# Altium PCB DataSampleHub.PcbDoc (part 3 of 3)
Units mil, origin at the board's own origin, x right, y up, seen from the top; angles counter-clockwise.
Board outline 7885.07 x 6309.28 mil, 2 copper layers (Top Layer, Bottom Layer), stack 65.792 mil thick; 360 components, 225 nets, 1247 pads, 854 vias.
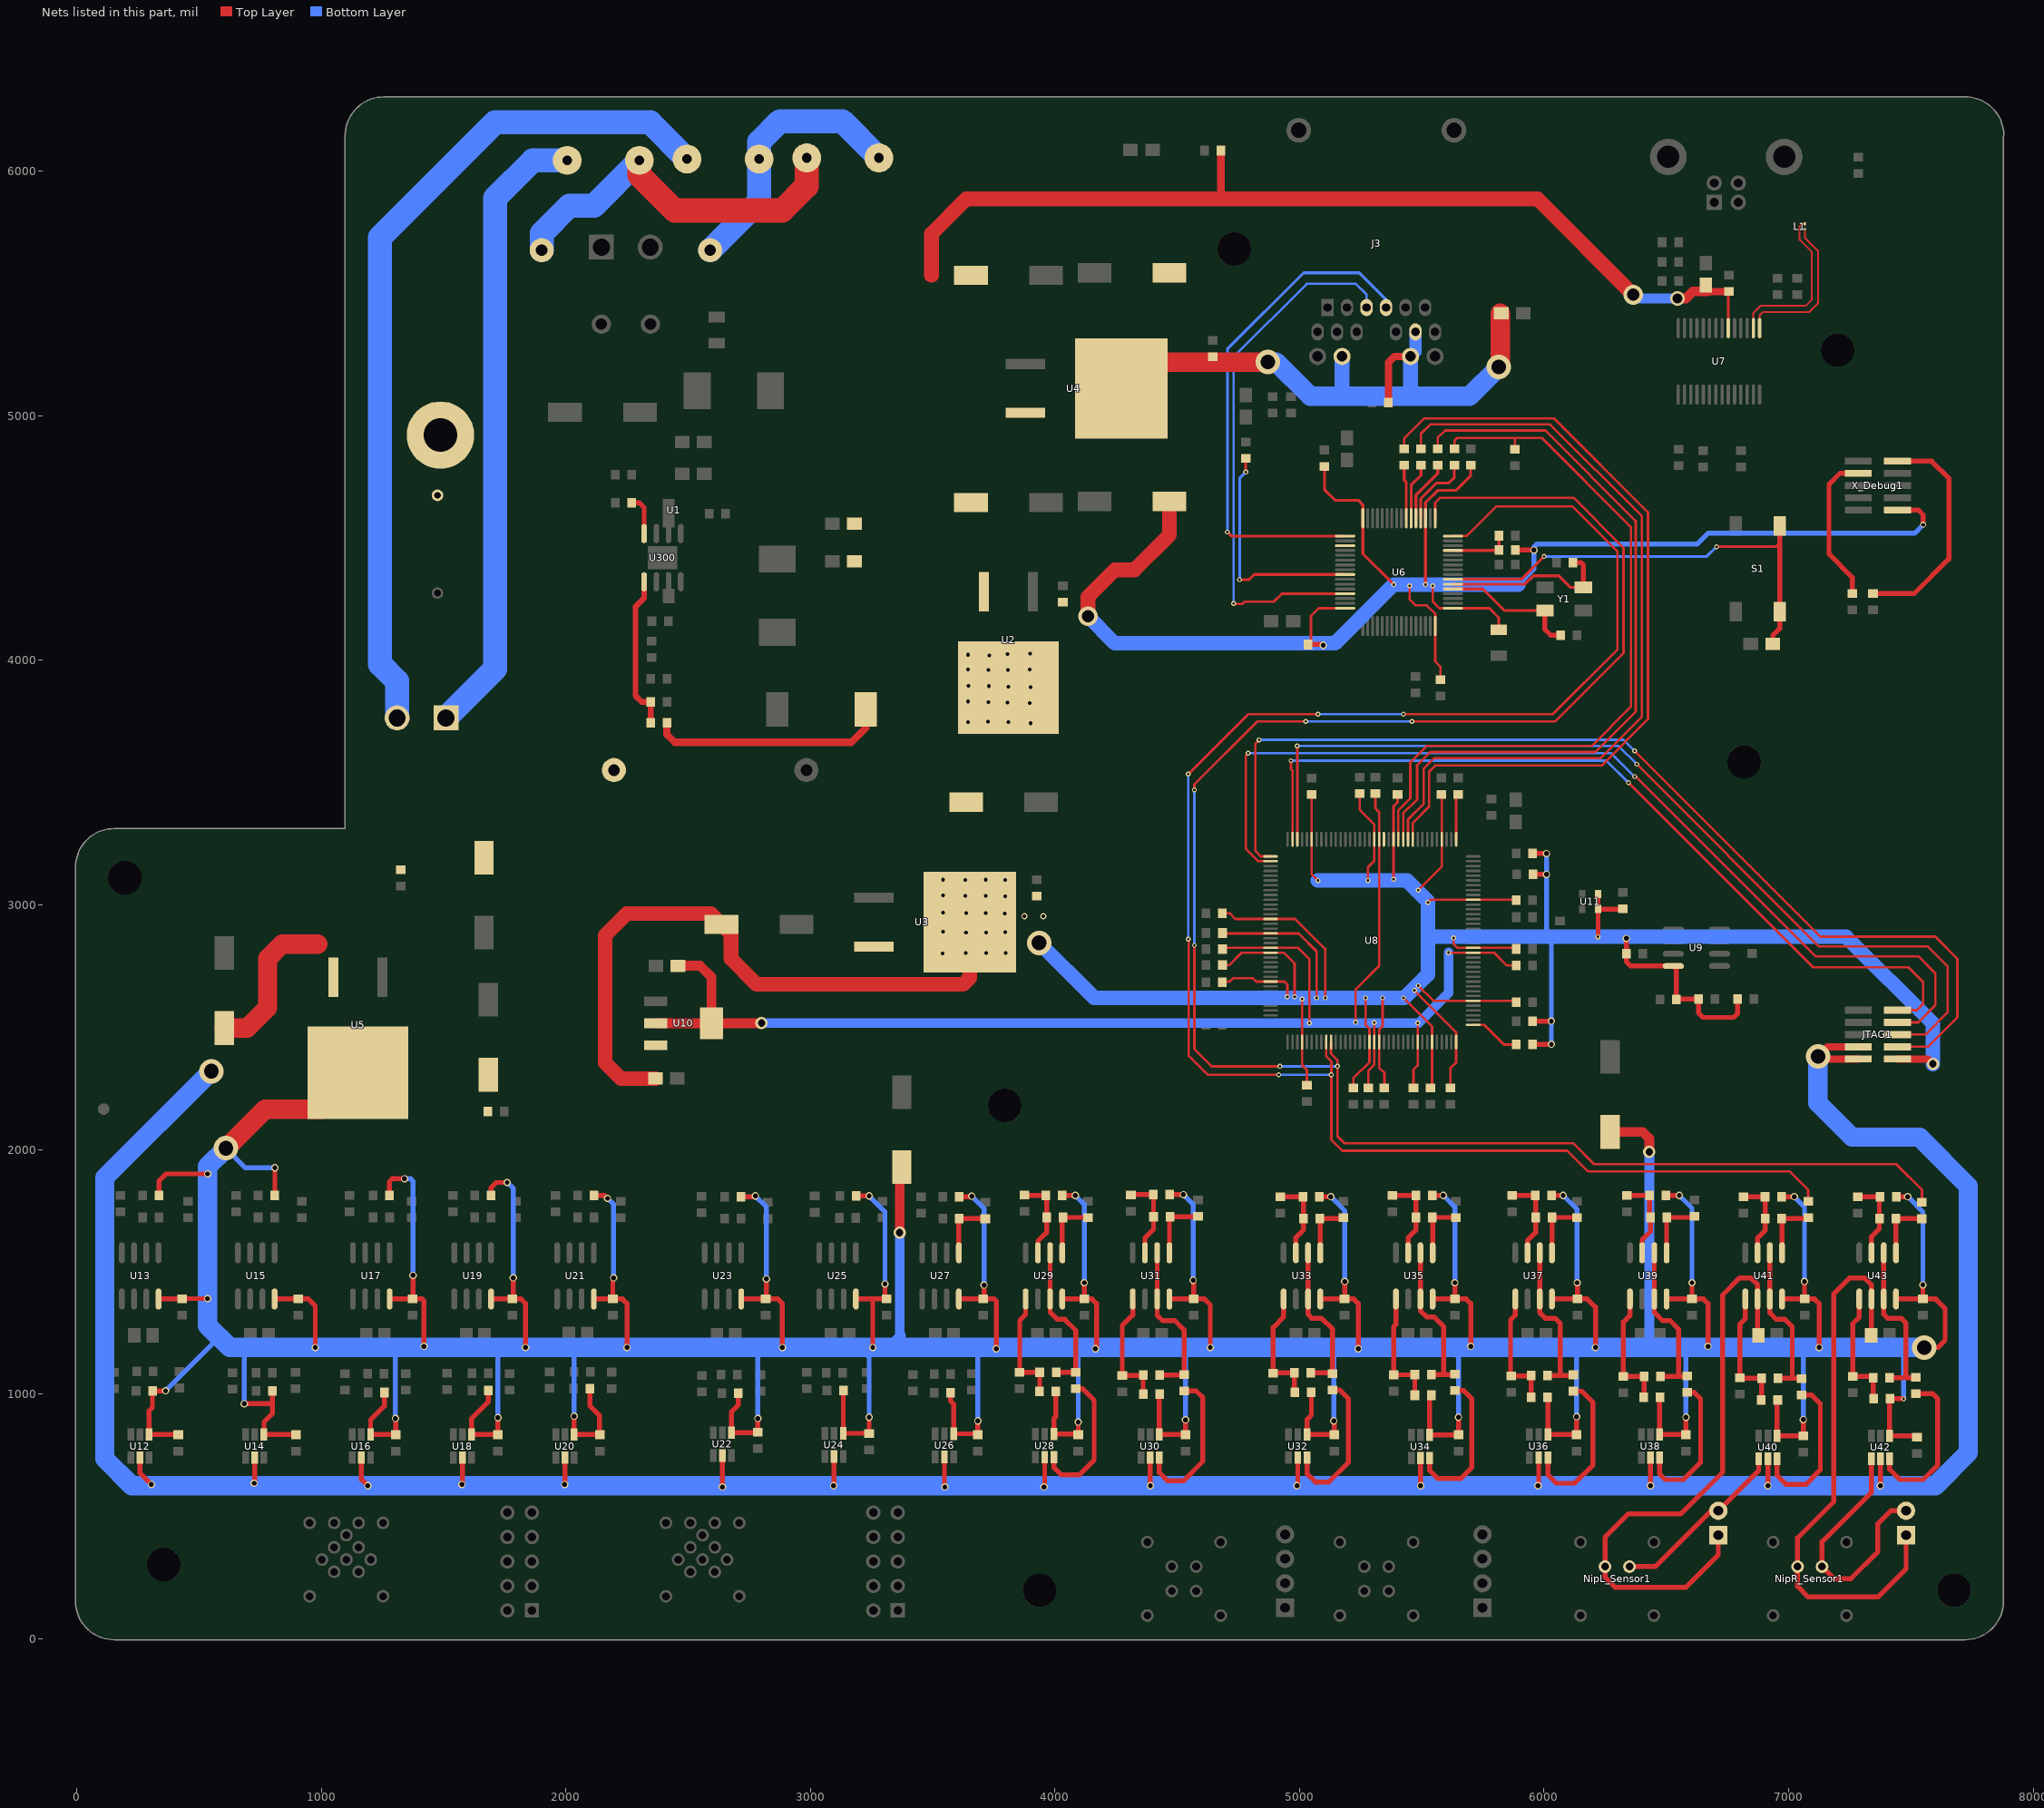
[diagram p3: the nets of this part, all layers, seen from the top]

## Via types
v1: diameter 25, hole 15, Top Layer to Bottom Layer, 584 vias
v2: diameter 20, hole 10, Top Layer to Bottom Layer, 130 vias
v3: diameter 30, hole 20, Top Layer to Bottom Layer, 103 vias
v4: diameter 50, hole 35, Top Layer to Bottom Layer, 11 vias
v5: diameter 100, hole 60, Top Layer to Bottom Layer, 7 vias
v6: diameter 50, hole 30, Top Layer to Bottom Layer, 4 vias
v7: diameter 40, hole 30, Top Layer to Bottom Layer, 4 vias
v8: diameter 19.68, hole 7.87, Top Layer to Bottom Layer, 4 vias
v9: diameter 80, hole 50, Top Layer to Bottom Layer, 2 vias
v10: diameter 133.86, hole 133.86, Top Layer to Bottom Layer, 2 vias
v11: diameter 35, hole 15, Top Layer to Bottom Layer, 1 vias
v12: diameter 60, hole 40, Top Layer to Bottom Layer, 1 vias
v13: diameter 20, hole 15, Top Layer to Bottom Layer, 1 vias

## Nets (pads, with @x,y where several pads share a name; then routed paths per layer and width w, separated by ;. In a path a pad name is that pad's centre, name@x,y a point inside that pad or via, vN(x,y) a via of type N, cw(c..) or ccw(c..) an arc to the next point about the centre after c; other vN are vias at no path point) (continued)
NetR89_2: R89.2 R152.1 U27.1 | length 236.8
  Top Layer w20: U27.1@3607,1577.49 3607,1715.54 R89.2@3608.46,1717 3704.53,1717 R152.1@3705,1716.54
NetR93_1: R93.1 U28.6 | length 583.1
  Top Layer w20: U28.6@3995.4,741.76 3995.4,699.6 4025,670 4100,670 4160,730 4160,975 4113.46,1021.54 R93.1@4085,1021.54
NetR93_2: R93.2 R97.2 U29.2 U29.7 | length 630.8
  Top Layer w20: U29.2@3980,1577.49 U29.7@3980,1388.51 3980,1335 4010,1305 4040,1305 4085,1260 R93.2@4085,1088.46 4084.47,1089 R97.2@4004.46,1089
NetR94_1: R94.1 R96.1 R98.2 U29.3 | length 338
  Top Layer w20: R98.2@3875,1811.46 3875.54,1812 R94.1@3962.54,1812 ; U29.3@3930,1577.49 3930,1625 3965.54,1660.54 R96.1@3965.54,1722 3965.54,1809 3963.07,1811.46 R94.1@3962.54,1811.46
NetR95_1: R95.1 R97.1 R99.2 U29.5 | length 472.2
  Top Layer w20: R99.2@3855,1088.46 R99.2@3856,1088.46 ; U29.5@3880,1388.51 3880,1325 3856,1301 R99.2@3856,1088.46 ; R95.1@3936.53,1010 3937.54,1011 R97.1@3937.54,1089 3937,1088.46 R99.2@3856,1088.46
NetR96_2: R96.2 R153.1 U29.1 | length 248.3
  Top Layer w20: U29.1@4030,1577.49 4030,1719.54 R96.2@4032.46,1722 4134.53,1722 R153.1@4135,1721.54
NetR100_1: R100.1 U30.6 | length 635.2
  Top Layer w20: U30.6@4426.4,739.76 4426.4,678.6 4460,645 4525,645 4605,725 4605,985 4577.47,1012.53 R100.1@4528,1012.53
NetR100_2: R100.2 R104.2 U31.2 U31.7 | length 674
  Top Layer w20: U31.2@4418,1577.49 U31.7@4418,1388.51 4418,1322 4440,1300 4490,1300 4528,1262 R100.2@4528,1079.46 4526.54,1078 R104.2@4427.46,1078
NetR101_1: R101.1 R103.1 R105.2 U31.3 | length 348.8
  Top Layer w20: R105.2@4314,1811 R105.2@4310.54,1814.46 4311.07,1815 R101.1@4401.54,1815 4403.07,1813.46 R103.1@4403.07,1725 4403.07,1673.07 4368,1638 U31.3@4368,1577.49
NetR102_1: R102.1 R104.1 R106.2 U31.5 | length 495.4
  Top Layer w20: U31.5@4318,1388.51 4318,1323 4275,1280 R106.2@4275,1075.46 4358,1075.46 R104.1@4360.54,1078 R102.1@4360.54,1000
NetR103_2: R103.2 R154.1 U31.1 | length 264
  Top Layer w20: U31.1@4468,1577.49 4468,1723 R103.2@4470,1725 4583.46,1725 R154.1@4585,1726.54
NetR107_1: R107.1 U32.6 | length 622.4
  Top Layer w20: U32.6@5030.4,739.76 5030.4,674.6 5065,640 5120,640 5200,720 5200,980 5163.47,1016.53 R107.1@5135,1016.53
NetR107_2: R107.2 R111.2 U33.2 U33.7 | length 648.9
  Top Layer w20: U33.2@5035,1577.49 U33.7@5035,1388.51 5035,1325 5050,1310 5090,1310 5135,1265 R107.2@5135,1083.46 5131.46,1087 R111.2@5046.46,1087
NetR108_1: R108.1 R110.1 R112.2 U33.3 | length 401.1
  Top Layer w20: R112.2@4921,1806.46 R112.2@4921.07,1806.54 ; U33.3@4985,1577.49 4985,1640 5016.54,1671.54 R110.1@5016.54,1717 5016.54,1805 R108.1@5014.54,1807 4921.54,1807 R112.2@4921.07,1806.54 ; 4985,1806.54 R112.2@4921.07,1806.54
NetR109_1: R109.1 R111.1 R113.2 U33.5 | length 491.3
  Top Layer w20: U33.5@4935,1388.51 4935,1315 4892,1272 R113.2@4892,1084.46 4894.54,1087 R111.1@4979.54,1087 4979.54,1009 R109.1@4981.54,1007
NetR110_2: R110.2 R159.1 U33.1 | length 238.6
  Top Layer w20: U33.1@5085,1577.49 5085,1715.46 R110.2@5083.46,1717 5175.47,1717 R159.1@5180,1721.54
NetR114_1: R114.1 U34.6 | length 618.2
  Top Layer w20: U34.6@5532.4,737.76 5532.4,687.6 5565,655 5660,655 5705,700 5705,980 5670.47,1014.53 R114.1@5636,1014.53
NetR114_2: R114.2 R118.2 U35.2 U35.7 | length 652.9
  Top Layer w20: U35.2@5494.27,1577.49 U35.7@5494.27,1388.51 5494.27,1340.73 5520,1315 5550,1315 5590,1275 5590,1080 ; R118.2@5538.46,1080 5590,1080 ; R114.2@5636,1081.46 5634.54,1080 5590,1080
NetR115_1: R115.1 R117.1 R119.2 U35.3 | length 344
  Top Layer w20: R119.2@5379,1811.46 R115.1@5475.54,1811.46 ; U35.3@5444.27,1577.49 5444.27,1639.27 5475.54,1670.54 R117.1@5475.54,1722 R115.1@5475.54,1811.46 ; R115.1@5475.54,1812 R115.1@5475.54,1811.46
NetR116_1: R116.1 R118.1 R120.2 U35.5 | length 486.1
  Top Layer w20: U35.5@5394.27,1388.51 5394.27,1284.27 5385,1275 R120.2@5385,1078.46 5470,1078.46 R118.1@5471.54,1080 R116.1@5471.54,995
NetR117_2: R117.2 R160.1 U35.1 | length 243
  Top Layer w20: U35.1@5544.27,1577.49 5544.27,1720.19 R117.2@5542.46,1722 5639.53,1722 R160.1@5640,1721.54
NetR121_1: R121.1 U36.6 | length 654.4
  Top Layer w20: U36.6@6015.4,739.76 6015.4,669.6 6050,635 6125,635 6200,710 6200,965 6153.47,1011.53 R121.1@6120,1011.53
NetR121_2: R121.2 R125.2 U37.2 U37.7 | length 667.4
  Top Layer w20: U37.2@5982.27,1577.49 U37.7@5982.27,1388.51 5982.27,1332.73 6005,1310 6045,1310 6065.5,1289.5 6065.5,1075 ; R125.2@6014.46,1075 6065.5,1075 ; R121.2@6120,1078.46 6116.54,1075 6065.5,1075
NetR122_1: R122.1 R124.1 R126.2 U37.3 | length 342.9
  Top Layer w20: R126.2@5870,1811.46 5870.54,1812 R122.1@5963.54,1812 5965.54,1810 R124.1@5965.54,1722 5965.54,1660.54 5932.27,1627.27 U37.3@5932.27,1577.49
NetR123_1: R123.1 R125.1 R127.2 U37.5 | length 496.4
  Top Layer w20: U37.5@5882.27,1388.51 5882.27,1322.27 5863,1303 5863,1075.46 R127.2@5865,1073.46 5946,1073.46 R125.1@5947.54,1075 5947.54,987 R123.1@5946.54,986
NetR124_2: R124.2 R157.1 U37.1 | length 242.3
  Top Layer w20: U37.1@6032.27,1577.49 6032.27,1721.81 R124.2@6032.46,1722 6129.53,1722 R157.1@6130,1721.54
NetR128_1: R128.1 U38.6 | length 599.1
  Top Layer w20: U38.6@6472.4,739.76 6472.4,672.6 6495,650 6570,650 6640,720 6640,980 6613.47,1006.53 R128.1@6585,1006.53
NetR128_2: R128.2 R132.2 U39.2 U39.7 | length 673.2
  Top Layer w20: U39.2@6451,1577.49 U39.7@6451,1388.51 6451,1334 6485,1300 6515,1300 6550,1265 6550,1072 ; R132.2@6476.46,1072 6550,1072 ; R128.2@6585,1073.46 6583.54,1072 6550,1072
NetR129_1: R129.1 R131.1 R133.2 U39.3 | length 342.8
  Top Layer w20: R133.2@6339,1811.46 6432.07,1811.46 6432.07,1725.46 R131.1@6435.54,1722 6435.54,1665.54 6401,1631 U39.3@6401,1577.49
NetR130_1: R130.1 R132.1 R134.2 U39.5 | length 499.8
  Top Layer w20: U39.5@6351,1388.51 6351,1321 6324,1294 R134.2@6324,1072.46 6409.07,1072.46 R132.1@6409.54,1072 6409.54,988 R130.1@6407.54,986
NetR131_2: R131.2 R158.1 U39.1 | length 259.5
  Top Layer w20: U39.1@6501,1577.49 6501,1720.54 R131.2@6502.46,1722 6610.47,1722 R158.1@6615,1726.54
NetR135_1: R135.1 U40.6 | length 646.9
  Top Layer w20: U40.6@6952.4,734.76 6952.4,667.6 6990,630 7070,630 7130,690 7130,960 7094.47,995.53 R135.1@7053,995.53
NetR135_2: R135.2 R139.2 U41.2 U41.7 | length 669.3
  Top Layer w20: U41.2@6923,1577.49 U41.7@6923,1388.51 6923,1332 6950,1305 6985,1305 7015,1275 7015,1064 ; R139.2@6956.46,1064 7015,1064 ; R135.2@7053,1062.46 7051.46,1064 7015,1064
NetR136_1: R136.1 R138.1 R140.2 U41.3 | length 330.7
  Top Layer w20: R140.2@6816,1806.46 6816.54,1807 R136.1@6903.54,1807 6904.54,1806 R138.1@6904.54,1717 6904.54,1669.54 6873,1638 U41.3@6873,1577.49
NetR137_1: R137.1 R139.1 R141.2 U41.5 | length 509.1
  Top Layer w20: U41.5@6823,1388.51 6823,1308 6801,1286 R141.2@6801,1066.46 6803.46,1064 R139.1@6889.54,1064 6889.54,977 R137.1@6888.54,976
NetR138_2: R138.2 R155.1 U41.1 | length 250.6
  Top Layer w20: U41.1@6973,1577.49 6973,1715.46 R138.2@6971.46,1717 7075.47,1717 R155.1@7080,1721.54
NetR142_1: R142.1 U42.6 | length 650.8
  Top Layer w20: U42.6@7413.4,734.76 7413.4,691.6 7455,650 7550,650 7610,710 7610,980 7588.47,1001.53 R142.1@7520,1001.53
NetR142_2: R142.2 R146.2 U43.2 U43.7 | length 688.5
  Top Layer w20: U43.2@7389,1577.49 U43.7@7389,1388.51 7389,1326 7405,1310 7460,1310 7480,1290 7480,1067 ; R146.2@7412.46,1067 7480,1067 ; R142.2@7520,1068.46 7518.54,1067 7480,1067
NetR143_1: R143.1 R145.1 R147.2 U43.3 | length 337.6
  Top Layer w20: R147.2@7287.07,1802.93 R147.2@7283.54,1806.46 7284.07,1807 R143.1@7373.07,1807 ; U43.3@7339,1577.49 7339,1644 7371.07,1676.07 R145.1@7371.07,1717 7371.07,1805 R143.1@7372.53,1806.46
NetR144_1: R144.1 R146.1 R148.2 U43.5 | length 499.9
  Top Layer w20: U43.5@7289,1388.51 7289,1314 7262,1287 R148.2@7262,1072.46 7340.07,1072.46 R146.1@7345.54,1067 7345.54,983 R144.1@7347.54,981
NetR145_2: R145.2 R156.1 U43.1 | length 247.1
  Top Layer w20: U43.1@7439,1577.49 7439,1716 R145.2@7438,1717 7544.53,1717 R156.1@7545,1716.54
NetR300_1: R300.1 R302.2 U300.5 | length 638
  Top Layer w23.62: U300.5@2320,4321.57 2320,4255 2285,4220 2285,3855 2310,3830 R302.2@2346.54,3830 R300.1@2346.54,3745
NetR303_2: R303.2 U300.4 | length 166.4
  Top Layer w19.68: R303.2@2268.46,4645 2300,4645 2320,4625 U300.4@2320,4518.43
NIPL_CON0: C92.2 NipL_Sensor1.1 NipL_Sensor.1 U41.6 | length 2494.3
  Top Layer w20: NipL_Sensor1.1@6249.21,286.22 NipL_Sensor1.1@6249.21,294.09 ; NipL_Sensor.1@6712.6,422.44 6712.6,342.6 6580,210 6290,210 6249.21,250.79 NipL_Sensor1.1@6249.21,294.09 ; C92.2@6876.6,1240 6873,1243.6 U41.6@6873,1388.51 6873,1447 6845,1475 6800,1475 6730,1405 6730,680 6560,510 6345,510 6249.21,414.21 NipL_Sensor1.1@6249.21,294.09
NIPL_CON1: NipL_Sensor1.2 NipL_Sensor.2 U40.4 | length 738.6
  Top Layer w20: NipL_Sensor1.2@6349.21,294.09 6454.09,294.09 6682.44,522.44 NipL_Sensor.2@6712.6,522.44 6877.6,687.44 U40.4@6877.6,734.76
NIPL_SENSOR: R155.2 U6.16 U8.9 | length 7423.6
  Top Layer w10: v2(4545,2860) 4547,2858 4547,2383 4625,2305 v2(4915,2305) ; v2(4545,3535) 4790,3780 v2(5075,3780) ; U8.9@5108.99,2439.63 5108.99,2381.01 5130,2360 v2(5130,2305) 5130,2040 5175,1995 6095,1995 6180,1910 7005,1910 7080,1835 R155.2@7080,1788.46 ; v2(5425,3780) 6035,3780 6300,4045 6300,4445 6115,4630 5805,4630 5683.64,4508.64 U6.16@5627.47,4508.64
  Bottom Layer w10: v2(4545,2860) v2(4545,3535) ; v2(4915,2305) v2(5130,2305) ; v2(5075,3780) v2(5425,3780)
NIPR_CON0: C93.2 NipR_Sensor1.1 NipR_Sensor.1 U43.6 | length 2312
  Top Layer w20: NipR_Sensor1.1@7036.61,286.22 NipR_Sensor1.1@7036.61,294.09 ; C93.2@7337.6,1240 7339,1241.4 U43.6@7339,1388.51 7339,1446 7310,1475 7250,1475 7185,1410 7185,560 7036.61,411.61 NipR_Sensor1.1@7036.61,294.09 ; NipR_Sensor.1@7480.31,422.44 7480.31,285.32 7365,170 7080,170 7036.61,213.39 NipR_Sensor1.1@7036.61,294.09
NIPR_CON1: NipR_Sensor1.2 NipR_Sensor.2 U42.4 | length 1078.5
  Top Layer w20: NipR_Sensor1.2@7136.61,286.22 NipR_Sensor1.2@7136.61,294.09 ; U42.4@7338.6,734.76 7338.6,598.6 7136.61,396.61 NipR_Sensor1.2@7136.61,294.09 ; NipR_Sensor.2@7480.31,522.44 7417.44,522.44 7365,470 7365,355 7255,245 7185.71,245 NipR_Sensor1.2@7136.61,294.09
NIPR_SENSOR: R156.2 U6.17 U8.10 | length 7959.5
  Top Layer w10: v2(4570,2835) 4570,2410 4640,2340 v2(4920,2340) ; v2(4570,3470) 4570,3493 4827,3750 v2(5025,3750) ; U8.10@5128.68,2439.63 5128.68,2391.32 5155,2365 v2(5155,2340) 5155,2055 5185,2025 6120,2025 6205,1940 7440,1940 7545,1835 R156.2@7545,1783.46 ; v2(5460,3750) 6045,3750 6325,4030 6325,4460 6120,4665 5575,4665 5554.64,4644.64 U6.17@5554.64,4581.47
  Bottom Layer w10: v2(4570,2835) v2(4570,3470) ; v2(4920,2340) v2(5155,2340) ; v2(5025,3750) v2(5460,3750)
PE: PAD.1 R3.1
POWER_L: F1.2 R1.2 U1.2 | length 1553
  Top Layer w98.43: F1.2@2300.28,6045 2300.28,5984.72 2445,5840 2885,5840 2984.72,5939.72 R1.2@2984.72,6055
  Bottom Layer w98.43: U1.2@1901.02,5677.36 1901.02,5746.02 2015,5860 2115.28,5860 F1.2@2300.28,6045
POWER_N: F2.2 R1.1 U1.1 | length 1112.8
  Bottom Layer w98.43: U1.1@2590,5677.36 2790.28,5877.64 F2.2@2790.28,6050 2790.28,6120.28 2875,6205 3130,6205 R1.1@3280,6055
POWERIN_L: F1.1 J1.1 | length 2567
  Bottom Layer w98.43: J1.1@1510,3765 1710,3965 1710,5890 1865,6045 F1.1@2005,6045
POWERIN_N: F2.1 J1.2 | length 3505.8
  Bottom Layer w98.43: J1.2@1310,3765 1310,3915 1240,3985 1240,5730 1710,6200 2345,6200 F2.1@2495,6050
PROM_B: R29.1 U8.37 | length 208.5
  Top Layer w10: U8.37@5710.37,2509.51 5755.49,2509.51 5836,2429 R29.1@5885.54,2429
PWR5V: C1.1 C2.2 C5.1 C8.1 C11.1 C14.1 C15.2 C16.1 C302.2 C303.2 JTAG1.2 JTAG1.4 L300.2 R2.2 R300.2 U1.4 U2.3 U3.3 U4.3 U5.3 U7.20 U12.5 U14.5 U16.5 U18.5 U20.5 U22.5 U24.5 U26.5 U28.5 U30.5 U32.5 U34.5 U36.5 U38.5 U40.5 U42.5 | length 19388.7
  Top Layer w10: U7.20@6753.39,5358.83 6753.39,5505.92 C16.1@6756,5508.53
  Top Layer w20: U12.5@258,739.76 258,677 v3(305,630) ; v3(725,635) 728,638 U14.5@728,739.76 ; U16.5@1164,739.76 1164,651 v3(1190,625) ; v3(1575,630) 1576.73,631.73 U18.5@1576.73,739.76 ; v3(1995,630) 1996.54,631.54 U20.5@1996.54,739.76 ; v3(2640,620) U22.5@2640,747.76 ; v3(3095,625) 3097,627 U24.5@3097,744.76 ; U26.5@3548,742.76 3548,622 v3(3550,620) ; v3(3955,620) 3958,623 U28.5@3958,741.76 ; U30.5@4389,739.76 4389,626 v3(4390,625) ; v3(4990,625) 4993,628 U32.5@4993,739.76 ; v3(5495,625) U34.5@5495,737.76 ; v3(5975,625) 5978,628 U36.5@5978,739.76 ; v3(6435,625) U38.5@6435,739.76 ; v3(6915,625) U40.5@6915,734.76 ; v3@7376,626 U42.5@7376,734.76
  Top Layer w30: R300.2@2413.46,3745 2413.46,3696.54 2445,3665 3168,3665 3226.1,3723.1 L300.2@3226.1,3800 ; 4672,5887 4678.46,5893.46 R2.2@4678.46,6085 ; C15.2@6671,5508.85 6671.32,5508.53 C16.1@6756,5508.53 ; JTAG1.2@7285,2370 7130,2370 v5(7120,2380) 7160,2420 JTAG1.4@7285,2420
  Top Layer w31.5: C1.1@1665,3193.54 C1.1@1665.08,3193.46
  Top Layer w40: v12(6545,5480) 6580,5480 6608.85,5508.85 C15.2@6671,5508.85
  Top Layer w60: 3495,5575 3495,5745 3637,5887 4672,5887 5973,5887 v9(6365,5495) v9@6370,5490
  Top Layer w78.74: C14.1@603,2496.46 696.46,2496.46 780,2580 780,2780 840,2840 985,2840
  Bottom Layer w40: v9(6365,5495) 6380,5480 v12(6545,5480)
  Bottom Layer w78.74: v5(550,2320) 115,1885 115,735 225,625 v3(1190,625) v3(3095,625) v3(4390,625) v3(4990,625) v3(5495,625) v3(5975,625) v3(6435,625) v3(6915,625) v3(7375,625) 7600,625 7735,760 7735,1850 7535,2050 7260,2050 7120,2190 v5(7120,2380)
R\E\S\E\T\: C20.1 S1.3 S1.4 U6.7 | length 1892.1
  Top Layer w11.81: U6.7@5627.47,4331.47 5906.47,4331.47 v2(6000,4425) ; v2(6705,4465) 6949,4465 6964,4480
  Top Layer w20: C20.1@6935,4068 6935,4102 6964,4131 S1.4@6964,4200 6964,4480 S1.3@6964,4550
  Bottom Layer w11.81: v2(6000,4425) 6665,4425 v2(6705,4465)
RJ45_RST: J3.4 U6.33 | length 2092.7
  Top Layer w11.81: v2(4705,4525) 4721.36,4508.64 U6.33@5186.53,4508.64
  Bottom Layer w11.81: v2(4705,4525) 4705,5273 5017,5585 5245,5585 5354,5476 J3.4@5354,5443
RTS: U8.88
RTS1: J3.3 U6.45 | length 2221
  Top Layer w10: v2(4730,4233) 4732,4231 4767,4231 4776,4240 4895,4240 4927.42,4272.42 U6.45@5186.53,4272.42
  Bottom Layer w10: v2(4730,4233) 4730,5240 5030,5540 5230,5540 5274,5496 J3.3@5274,5443
RTS3: U6.35
SPI1_MISO: R11.2 U8.83 | length 3251.9
  Top Layer w10: U8.83@5443.64,3268.37 5443.64,3349.64 5508,3414 5508,3558 5550,3600 6230,3600 6400,3770 6400,4020 6400,4590 6025,4965 5535,4965 5496.58,4926.58 R11.2@5496.58,4865.46
SPI1_MISO1: R11.1 U6.22 | length 240.3
  Top Layer w11.81: U6.22@5456.21,4581.47 5456.21,4716.21 5496.58,4756.58 R11.1@5496.58,4798.54 R11.1@5501.21,4793.91
SPI1_MOSI: R12.2 U8.82 | length 3366.2
  Top Layer w10: R12.2@5428.23,4865.46 5428.23,4908.23 5510,4990 6040,4990 6425,4605 6425,3760 6235,3570 5555,3570 5530,3545 5530,3402 5463.32,3335.32 U8.82@5463.32,3268.37
SPI1_MOSI1: R12.1 U6.23 | length 220.5
  Top Layer w11.81: R12.1@5428.23,4798.54 5428.23,4736.77 5436.53,4728.47 U6.23@5436.53,4581.47
SPI1_NSS: C107.2 R9.2 U8.85 | length 3023
  Top Layer w10: U8.85@5404.27,3268.37 5404.27,3387.27 5453,3436 5453,3583 5520,3650 6195,3650 6355,3810 6355,4545 5990,4910 5645,4910 5633.29,4898.29 R9.2@5633.29,4865.46 ; C107.2@5880,4863.46 5880,4910
SPI1_NSS1: R9.1 U6.20 | length 303.4
  Top Layer w11.81: U6.20@5495.58,4581.47 5495.58,4660.58 5560,4725 5610,4725 5633.29,4748.29 R9.1@5633.29,4798.54
SPI1_SCK: R10.2 U8.84 | length 3111.2
  Top Layer w10: U8.84@5423.95,3268.37 5423.95,3373.95 5481,3431 5481,3571 5535,3625 6210,3625 6375,3790 6375,4145 6375,4570 6005,4940 5595,4940 5564.94,4909.94 R10.2@5564.94,4865.46
SPI1_SCK1: R10.1 U6.21 | length 253.9
  Top Layer w11.81: U6.21@5475.9,4581.47 5475.9,4675.9 5564.94,4764.94 R10.1@5564.94,4798.54
STATUS: R21.2 U6.41 | length 947.2
  Top Layer w11.81: v2(4755,4330) 4793.84,4330 4815,4351.16 U6.41@5186.53,4351.16 ; v2(4780,4770) R21.2@4780,4826.54
  Bottom Layer w11.81: v2(4755,4330) 4755,4745 v2(4780,4770)
SUSPEND: R30.2 U8.73 | length 187.7
  Top Layer w10: U8.73@5640.49,3268.37 5640.49,3444.02 R30.2@5649,3452.53
SWCLK: R18.2 X_Debug1.8 | length 624.5
  Top Layer w20: R18.2@7260,4273.46 7260,4340 7165,4435 7165,4720 7210,4765 X_Debug1.8@7285,4765
SWDIO: R17.2 X_Debug1.9 | length 937.6
  Top Layer w20: R17.2@7345,4273.47 7513.47,4273.47 7655,4415 7655,4745 7585,4815 X_Debug1.9@7445,4815
TCK: JTAG1.3 U8.109 | length 4292.2
  Top Layer w10: v2(4835,3675) 4820,3660 4820,3220 4841.51,3198.49 U8.109@4881.63,3198.49 ; v2(6370,3630) 7130,2870 7600,2870 7690,2780 7690,2540 7570,2420 JTAG1.3@7445,2420
  Bottom Layer w10: v2(4835,3675) 6325,3675 v2(6370,3630)
TDI: JTAG1.7 U8.110 | length 4013.8
  Top Layer w10: v2(4790,3620) 4780,3610 4780,3230 4831.2,3178.8 U8.110@4881.63,3178.8 ; v2(6370,3525) 6375,3525 7110,2790 7530,2790 7600,2720 7600,2590 7530,2520 JTAG1.7@7445,2520
  Bottom Layer w10: v2(4790,3620) 6275,3620 v2(6370,3525)
TDO: JTAG1.5 U8.106 | length 3847.1
  Top Layer w10: v2(4990,3650) 4990.88,3649.12 U8.106@4990.88,3268.37 ; v2(6380,3575) 7125,2830 7570,2830 7650,2750 7650,2560 7560,2470 JTAG1.5@7445,2470
  Bottom Layer w10: v2(4990,3650) 6305,3650 v2(6380,3575)
TMS: JTAG1.9 U8.107 | length 3489.4
  Top Layer w10: v2(4965,3590) 4965,3555 4971.2,3548.8 U8.107@4971.2,3268.37 ; v2(6345,3500) 7100,2745 7490,2745 7550,2685 7550,2595 7525,2570 JTAG1.9@7445,2570
  Bottom Layer w10: v2(4965,3590) 6255,3590 v2(6345,3500)
UC_DM: L1.2 U7.16 | length 670
  Top Layer w8: U7.16@6855.75,5358.83 6855.75,5420.75 6885,5450 7070,5450 7095,5475 7095,5670 7045,5720 7045,5775 7055.51,5785.51 L1.2@7066.26,5785.51
UC_DP: L1.3 U7.15 | length 637.4
  Top Layer w8: U7.15@6881.34,5358.83 6881.34,5411.34 6895,5425 7085,5425 7120,5460 7120,5675 7066.26,5728.74 L1.3@7066.26,5763.86
VCC: C12.1 C13.2 C62.2 C63.2 C64.2 C65.2 C66.2 C67.2 C68.2 C69.2 C70.2 C71.2 C77.1 C78.2 C79.2 C80.2 C81.2 C82.2 C83.2 C84.2 C85.2 C86.2 C87.2 C94.1 C95.2 C96.2 C97.2 C98.2 C99.2 C100.2 C101.2 C102.2 C103.2 C104.2 C105.2 C106.2 R38.2 R39.2 R45.2 R46.2 R52.2 R53.2 R59.2 R60.2 R66.2 R67.2 R73.2 R74.2 R80.2 R81.2 R87.2 R88.2 R94.2 R95.2 R101.2 R102.2 R108.2 R109.2 R115.2 R116.2 R122.2 R123.2 R129.2 R130.2 R136.2 R137.2 R143.2 R144.2 U5.4 U12.1 U13.8 U14.1 U15.8 U16.1 U17.8 U18.1 U19.8 U20.1 U21.8 U22.1 U23.8 U24.1 U25.8 U26.1 U27.8 U28.1 U29.8 U30.1 U31.8 U32.1 U33.8 U34.1 U35.8 U36.1 U37.8 U38.1 U39.8 U40.1 U41.8 U42.1 U43.8 | length 33886.7
  Top Layer w20: U13.8@334.27,1388.51 C63.2@431,1388.46 C63.2@431,1388.46 432.54,1390 v3(535,1390) ; R38.2@336.46,1812 336.46,1871.46 365,1900 v3(535,1900) ; v3(363,1013) R39.2@309.46,1013 309.46,944.46 295.4,930.4 U12.1@295.4,834.24 414.22,834.24 C62.2@415,833.46 ; v3(685,960) 794.46,960 799.46,955 ; R46.2@799.46,1012 799.46,955 ; R45.2@808.46,1812 810,1813.54 v3(810,1925) ; U15.8@809,1388.51 C65.2@906,1388.46 C65.2@906,1388.46 946.54,1388.46 975,1360 v3(975,1190) ; C64.2@897,833.46 896.22,834.24 U14.1@765.4,834.24 765.4,885.4 799.46,919.46 799.46,955 ; R53.2@1258.46,1006 1258.46,951.54 1201.4,894.47 U16.1@1201.4,834.24 1303.22,834.24 C66.2@1304,833.46 1304,899 v3(1303,900) ; R52.2@1278.46,1812 1278.46,1868.46 1290,1880 v3(1340,1880) ; U17.8@1279.27,1388.51 U17.8@1279.27,1388.51 C67.2@1373,1388.46 ; v3(1375,1485) 1375,1390.46 C67.2@1373,1388.46 ; v3(1420,1195) 1420,1380 1411.54,1388.46 C67.2@1373,1388.46 ; R60.2@1682.46,1014 1682.46,967.46 1614.13,899.13 U18.1@1614.13,834.24 1721.22,834.24 C68.2@1722,833.46 v3(1722,903) ; U19.8@1694,1388.51 C69.2@1781,1388.46 ; R59.2@1694.46,1812 1694.46,1844.46 1715,1865 v3(1760,1865) ; v3(1785,1475) 1785,1392.56 C69.2@1781,1388.46 ; v3(1835,1190) 1835,1370 1816.54,1388.46 C69.2@1781,1388.46 C69.2@1781,1388.46 ; v3(2033.94,908.94) U20.1@2033.94,834.24 2137.76,834.24 2137.76,912.24 2098,952 R67.2@2098,1022 ; U21.8@2114.27,1388.51 C71.2@2192,1388.46 ; R66.2@2115.46,1812 2158,1812 v3(2170,1800) ; v3(2195,1475) 2191.95,1471.95 C71.2@2192,1388.46 ; v3(2250,1190) 2250,1370 2231.54,1388.46 C71.2@2192,1388.46 C71.2@2192,1388.46 ; R74.2@2705.46,1003 2705.46,955.46 2677.4,927.4 U22.1@2677.4,842.24 2783.78,842.24 C78.2@2785,843.46 v3(2785,900) ; R73.2@2715.46,1807 2772,1807 v3(2775,1810) ; U23.8@2717,1388.51 C79.2@2817,1388.46 2820,1391.56 v3(2820,1470) ; C79.2@2817,1388.46 2866.54,1388.46 2885,1370 v3(2885,1190) ; R81.2@3134.46,1015 3134.46,839.31 U24.1@3134.4,839.24 3239.22,839.24 C80.2@3240,838.46 v3(3240,905) ; U25.8@3186,1388.51 C81.2@3311,1388.46 3305,1394.46 v3(3305,1450) ; R80.2@3188,1810 v3(3240,1810) ; v3(3255,1190) 3255,1383.51 ; R88.2@3572.46,1005 3572.46,972.54 3585.4,959.6 U26.1@3585.4,837.24 3681.22,837.24 C82.2@3685,833.46 v3(3685,890) ; U27.8@3607,1388.51 C83.2@3707,1388.46 3710,1391.56 v3(3710,1445) ; R87.2@3608.46,1807 3658,1807 v3(3660,1809) ; C83.2@3707,1388.46 3751.54,1388.46 3760,1380 v3(3760,1185) ; R95.2@4003.46,1010 4003.46,908.46 3995.4,900.4 U28.1@3995.4,836.24 4092.22,836.24 C84.2@4095,833.46 v3(4095,885) ; R94.2@4029.46,1812 v3(4083,1812) ; U29.8@4030,1388.51 C85.2@4120,1388.46 v3(4120,1455) ; C85.2@4120,1388.46 4151.54,1388.46 4170,1370 4170,1190 v3(4165,1185) ; R102.2@4427.46,1000 4426.4,998.94 U30.1@4426.4,834.24 C86.2@4533.22,834.24 ; U31.8@4468,1388.51 C87.2@4567,1388.46 ; R101.2@4468.46,1815 v3(4525,1815) ; C86.2@4534,833.46 v3(4534,894) ; v3(4565,1465) 4566.95,1463.05 C87.2@4567,1388.46 ; v3(4635,1190) 4635,1365 4611.54,1388.46 C87.2@4567,1388.46 C87.2@4567,1388.46 ; R109.2@5048.46,1007 5048.46,913.46 5030.4,895.4 U32.1@5030.4,834.24 5141.22,834.24 C95.2@5142,833.46 5142,888 v3(5140,890) ; R108.2@5081.46,1807 v3(5128,1807) ; U33.8@5085,1388.51 C96.2@5184,1388.46 5185,1389.56 v3(5185,1460) ; C96.2@5184,1388.46 5221.54,1388.46 5240,1370 v3(5240,1185) ; R116.2@5538.46,995 5532.4,988.94 U34.1@5532.4,832.24 5648.78,832.24 C97.2@5650,833.46 v3(5650,905) ; R115.2@5542.46,1812 v3(5588,1812) ; U35.8@5544.27,1388.51 C98.2@5636,1388.46 C98.2@5636,1388.46 5681.54,1388.46 5700,1370 v3(5700,1195) ; C98.2@5635,1389.46 v3(5635,1455) ; R123.2@6013.46,986 6015.4,984.06 U36.1@6015.4,834.24 6132.22,834.24 C99.2@6133,833.46 v3(6133,907) ; R122.2@6030.46,1812 v3(6078,1812) ; U37.8@6032.27,1388.51 C100.2@6136,1388.46 ; v3(6135,1455) 6135.95,1454.05 C100.2@6136,1388.46 ; v3(6210,1190) 6210,1355 6176.54,1388.46 C100.2@6136,1388.46 C100.2@6136,1388.46 ; R130.2@6474.46,986 6472.4,983.94 U38.1@6472.4,834.24 6579.22,834.24 C101.2@6580,833.46 v3(6580,905) ; R129.2@6498.46,1812 v3(6553,1812) ; U39.8@6501,1388.51 C102.2@6605,1388.46 ; v3(6605,1455) 6605,1388.56 C102.2@6605,1388.46 ; v3(6670,1195) 6670,1370 6651.54,1388.46 C102.2@6605,1388.46 C102.2@6605,1388.46 ; R137.2@6955.46,976 6952.4,972.94 U40.1@6952.4,829.24 C103.2@7059.22,829.24 ; R136.2@6970.46,1807 v3(7023,1807) ; U41.8@6973,1388.51 C104.2@7066,1388.46 7065,1389.46 v3(7065,1460) ; C103.2@7060,828.46 v3(7060,895) ; C104.2@7066,1388.46 7106.54,1388.46 7125,1370 v3(7125,1190) ; U43.8@7439,1388.51 C106.2@7549,1388.46 ; R143.2@7440,1807 v3(7487,1807) ; v2(7470,980) 7469,981 R144.2@7414.46,981 7413.4,979.94 U42.1@7413.4,829.24 7519.22,829.24 C105.2@7525,823.46 ; v3(7548.95,1446.05) C106.2@7549,1388.46 ; v5(7555,1190) 7610,1190 7640,1220 7640,1350 7601.54,1388.46 C106.2@7549,1388.46 C106.2@7549,1388.46
  Top Layer w40: v6(3365,1660) C77.1@3365,1913.46 ; C77.1@3379,1889 C77.1@3379,1913.46 ; C94.1@6270,2071.46 6403.54,2071.46 6430,2045 v6(6430,1990)
  Top Layer w80: v5(610,2005) 770,2165 1001.73,2165 U5.4@1150,2313.27
  Bottom Layer w20: v3(363,1013) 580,1230 ; v5(610,2005) 690,1925 v3(810,1925) ; v3(685,960) 685,1190 ; 1265,1190 1303,1152 v3(1303,900) ; v3(1340,1880) 1365,1880 1375,1870 v3(1375,1485) ; 1720,1190 1722,1188 v3(1722,903) ; v3(1760,1865) 1785,1840 v3(1785,1475) ; v3(2033.94,908.94) 2033.94,1188.94 2035,1190 ; v3(2170,1800) 2195,1775 v3(2195,1475) ; 2770,1190 2785,1175 v3(2785,900) ; v3(2775,1810) 2820,1765 v3(2820,1470) ; 3200,1190 3240,1150 v3(3240,905) ; v3(3240,1810) 3305,1745 v3(3305,1450) ; v3(3660,1809) 3710,1759 v3(3710,1445) ; v3(3685,890) 3685,1165 3705,1185 v3(3760,1185) ; v3(4083,1812) 4120,1775 v3(4120,1455) ; v3(4095,885) 4095,1180 4100,1185 v3(4165,1185) ; 4515,1190 4534,1171 v3(4534,894) ; v3(4525,1815) 4565,1775 v3(4565,1465) ; 5105,1190 5140,1155 v3(5140,890) ; v3(5128,1807) 5185,1750 v3(5185,1460) ; v3(5588,1812) 5635,1765 v3(5635,1455) ; 5610,1190 5650,1150 v3(5650,905) ; v3(6078,1812) 6135,1755 v3(6135,1455) ; 6110,1190 6133,1167 v3(6133,907) ; v3(6553,1812) 6605,1760 v3(6605,1455) ; 6560,1190 6580,1170 v3(6580,905) ; v3(7023,1807) 7065,1765 v3(7065,1460) ; 7030,1190 7060,1160 v3(7060,895) ; v2(7470,980) 7470,1190 ; v3(7487,1807) 7548.95,1745.05 v3(7548.95,1446.05)
  Bottom Layer w40: 3320,1190 3370,1240 3365,1245 v6(3365,1660) ; 6400,1190 6430,1220 v6(6430,1990)
  Bottom Layer w80: v5(610,2005) 535,1930 v3(535,1900) v3(535,1390) 535,1280 625,1190 685,1190 v3(975,1190) 1265,1190 1720,1190 v3(1835,1190) 2035,1190 v3(2250,1190) 2770,1190 v3(2885,1190) 3200,1190 v3(3255,1190) 3320,1190 4515,1190 v3(4635,1190) 5105,1190 5610,1190 6110,1190 v3(6210,1190) 6400,1190 6560,1190 7030,1190 v3(7125,1190) 7470,1190 v5(7555,1190)
VCC1V2: C48.2 C49.2 C50.2 C51.2 C52.2 C54.2 U8.19 U8.28 U8.52 U8.89 U8.128 U10.2 U10.4 | length 6280.5
  Top Layer w10: C52.2@4685,2819 4690.47,2824.47 U8.128@4881.63,2824.47 4995.53,2824.47 5040,2780 v2(5040,2517) ; v2(5230,2520) 5230,2655 5325.53,2750.53 U8.89@5325.53,3268.37 5325.53,3379.47 5310,3395 C51.2@5310,3455 ; C48.2@5281,2251.46 5281,2322 5305.84,2346.84 U8.19@5305.84,2439.63 v2(5305.84,2519.16) ; C49.2@5466,2251.46 5466,2326 5483.01,2343.01 U8.28@5483.01,2439.63 v2(5483.01,2516.99) ; v2(5610,2805) 5610.21,2804.79 U8.52@5710.37,2804.79 5795.21,2804.79 5848,2752 C50.2@5885.54,2752
  Top Layer w40: U10.2@2366.83,2516 U10.4@2595.17,2516 ; C54.2@2458,2751 2549,2751 2595.17,2704.83 U10.4@2595.17,2516 ; v6(2800,2517) 2799,2516 U10.4@2595.17,2516
  Bottom Layer w10: v2@5035,2517 5040,2522 v2(5040,2517)
  Bottom Layer w40: v6(2800,2517) 5035,2517 v2(5040,2517) v2(5483.01,2516.99) ; v2@5487,2517 5610,2640 v2(5610,2805)
VCC_FPGA: C6.1 C7.2 C31.2 C32.2 C33.2 C34.2 C35.2 C36.2 C37.2 C38.2 C39.2 C40.2 C41.2 C42.2 C43.2 C44.2 C45.2 C46.2 C47.2 C53.2 C55.2 JTAG1.1 R25.1 R27.1 R28.2 R29.2 R32.2 R33.2 R34.2 U3.4 U8.4 U8.18 U8.20 U8.31 U8.36 U8.42 U8.53 U8.63 U8.76 U8.86 U8.90 U8.103 U8.122 U8.125 U8.129 U8.135 U9.8 U10.3 U11.1 U11.4 | length 16667.4
  Top Layer w10: C35.2@4676.14,2686.68 C35.2@4686.14,2686.68 ; C35.2@4683.46,2684 C35.2@4686.14,2686.68 ; C32.2@4683.46,2966 4714,2966 4737.42,2942.58 U8.122@4881.63,2942.58 4982.42,2942.58 5105,2820 v2(5105,2620) ; C34.2@4685,2754 4713,2754 4763.79,2804.79 U8.129@4881.63,2804.79 4935.21,2804.79 4980,2760 v2(4980,2625) ; C33.2@4685,2885 4686.47,2883.53 U8.125@4881.63,2883.53 4996.47,2883.53 5070,2810 v2(5070,2620) ; v2(4950,2625) 4950,2675 4938.32,2686.68 U8.135@4881.63,2686.68 4823.32,2686.68 4810,2700 4728.32,2700 4715,2686.68 C35.2@4686.14,2686.68 ; v2(5010.57,2615.57) U8.4@5010.57,2439.63 5010.57,2344.43 5030,2325 C36.2@5030,2263.46 ; C47.2@5049.94,3451.53 U8.103@5049.94,3268.37 5049.94,3125.06 v2(5075,3100) ; C37.2@5220,2251.46 5220,2291 5286.16,2357.16 U8.18@5286.16,2439.63 5286.16,2493.84 5270,2510 v2(5270,2620) ; C46.2@5246,3455 5246,3389 5305.84,3329.16 U8.90@5305.84,3268.37 5305.84,3180.84 5280,3155 v2(5280,3100) ; v2(5340,2620) 5340,2505 5325.53,2490.53 U8.20@5325.53,2439.63 5325.53,2334.47 5347,2313 C38.2@5347,2251.46 ; v2(5384.58,3104.58) U8.86@5384.58,3268.37 5384.58,3403.58 5401,3420 C45.2@5401,3452.53 ; v2(5425,2620) 5542.06,2502.94 U8.31@5542.06,2439.63 5542.06,2258.53 C39.2@5535,2251.46 ; v2(5470,2650) 5640.49,2479.51 U8.36@5640.49,2439.63 5640.49,2355.49 5617,2332 C40.2@5617,2251.46 ; v2(5485,2670) 5547.06,2607.94 U8.42@5710.37,2607.94 5879.6,2607.94 C41.2@5885.54,2602 ; v2(5485,3060) 5581.43,3156.43 U8.76@5581.43,3268.37 5581.43,3451.1 C44.2@5580,3452.53 ; v2(5525,3010) 5536.32,3021.32 U8.63@5710.37,3021.32 5885.21,3021.32 C43.2@5886.54,3020 ; v2(5630,2865) 5630,2840 5645.53,2824.47 U8.53@5710.37,2824.47 5881.06,2824.47 C42.2@5885.54,2820 ; C55.2@6321.44,2982.98 C55.2@6322,2983.54
  Top Layer w20: R29.2@5952.46,2429 6031,2429 v3(6030,2430) ; R27.1@5953.46,2525 v3(6030,2525) ; R28.2@5953.46,3210 v3(6010,3210) ; R25.1@5955,3125 v3(6010,3125) ; v2(6220,2870) 6221,2871 U11.4@6221,2982.98 ; U11.1@6221,3044 U11.4@6221,2982.98 ; C55.2@6321.44,2982.98 U11.4@6221,2982.98 ; v3(6336.54,2863.46) R33.2@6336.54,2800 6336.54,2768.46 6355,2750 U9.8@6528.51,2750 6540.46,2738.05 C31.2@6540.46,2614 6541.46,2615 R34.2@6631.54,2615 6631.54,2558.46 6650,2540 6775,2540 6791.54,2556.54 R32.2@6791.54,2615
  Top Layer w30: JTAG1.1@7445,2370 7570,2370 v6(7590,2350)
  Top Layer w60: C53.2@2366,2290 2225,2290 2160,2355 2160,2875 2250,2965 2591.46,2965 C6.1@2636.46,2920 2675,2881.46 2675,2780 2780,2675 3625,2675 3651.73,2701.73 U3.4@3651.73,2930
  Bottom Layer w20: v3(6010,3210) v3(6010,3125) 6010,2870 6030,2850 v3(6030,2525) v3(6030,2430) ; v3@6330,2870 v3(6336.54,2863.46)
  Bottom Layer w60: v5(3935,2845) 4160,2620 4980,2620 v2(5070,2620) v2(5105,2620) v2(5270,2620) v2(5340,2620) v2(5425,2620) 5430,2620 5525,2715 5525,2870 ; v2(5075,3100) v2(5280,3100) 5440,3100 5525,3015 v2(5525,3010) 5525,2870 ; v6(7590,2350) 7590,2515 7235,2870 6330,2870 v2(6220,2870) 6010,2870 5525,2870
  other v1: 3541,2801 3635,2803 3718,2803 3798,2804 3636,2887 3718,2887 3797,2888 3542,2890 3875,2954 3952,2954 3795,2965 3637,2966 3717,2967 3542,2969 3797,3035 3633,3038 3717,3038 3543,3039 3634,3102 3797,3102 3543,3103 3717,3103
VCC_MCU: C3.1 C4.2 C23.1 C24.1 C25.1 C26.1 C27.1 FB2.1 U2.4 U6.1 U6.19 U6.32 U6.48 U6.64 X_Debug1.1 | length 7459.4
  Top Layer w10: v2(5450,4305) 5450,4250 5475,4225 5520,4225 5554.64,4190.36 U6.64@5554.64,4140.53 5554.64,3995.36 5576,3974 C24.1@5576,3921.46 ; v2(5545,4305) 5545,4240 5571.64,4213.36 U6.1@5627.47,4213.36 5776.64,4213.36 5815,4175 C23.1@5815,4125.15 ; C23.1@5790.85,4117 C23.1@5790.85,4125.15
  Top Layer w11.81: C25.1@5046.64,4076.17 5046.64,4181.64 5078.36,4213.36 U6.48@5186.53,4213.36 ; C26.1@5102,4793.54 5102,4698 5145,4655 5240,4655 5259.36,4635.64 U6.32@5259.36,4581.47 5259.36,4435.64 v2(5385,4310) ; v2(5515,4310) 5515.27,4310.27 U6.19@5515.27,4581.47 5515.27,4645.27 5565,4695 5639,4695 5700,4756 C27.1@5700,4798.54
  Top Layer w20: C25.1@5035.46,4065 5094,4065 v3(5097,4062) ; FB2.1@5882.46,4451 v3(5959,4451) ; X_Debug1.1@7445,4615 7530,4615 7550,4595 v1(7550,4555)
  Top Layer w60: U2.4@3670,3745 U2.4@3809.8,3884.8 ; U2.4@3784.8,3949.8 U2.4@3918.15,3816.46 ; U2.4@3808.07,3886.54 U2.4@3809.8,3884.8 ; U2.4@3809.8,3888.27 U2.4@3809.8,3884.8 ; v9(4135,4180) 4135,4260 4245,4370 4325,4370 4468.54,4513.54 C3.1@4468.54,4650
  Bottom Layer w20: 5895,4310 5959,4374 v3(5959,4451) 5959,4464 5970,4475 6625,4475 6670,4520 7515,4520 v1(7550,4555)
  Bottom Layer w60: v9(4135,4180) 4245,4070 5145,4070 v2(5385,4310) v2(5515,4310) 5895,4310
  other v1: 3901,3743 3645,3748 3810,3748 3726,3749 3897,3826 3806,3827 3728,3829 3645,3832 3901,3891 3809,3892 3730,3895 3646,3896 3728,3961 3807,3961 3645,3963 3896,3963 3731,4020 3644,4023 3806,4026 3898,4027
VCC_PER: C9.1 C10.2 C29.2 C30.2 J3.11 J3.14 J3.15 U4.4 | length 2635.6
  Top Layer w30: C30.2@5363.46,5055 5363.46,5218.46 5388,5243 J3.15@5454,5243
  Top Layer w80: U4.4@4270.73,5112 4378.73,5220 v5(4870,5220) ; v5(5815,5200) 5821.46,5206.46 C29.2@5821.46,5420
  Bottom Layer w50: J3.15@5454,5243 5474,5263 J3.11@5474,5343
  Bottom Layer w60: 5150,5080 5174,5104 J3.14@5174,5243 ; 5435,5080 5454,5099 J3.15@5454,5243
  Bottom Layer w80: v5(4870,5220) 4905,5220 5045,5080 5150,5080 5435,5080 5695,5080 v5(5815,5200)
VDDA: C28.1 FB2.2 U6.13 | length 247.6
  Top Layer w11.81: U6.13@5627.47,4449.58 5814.12,4449.58 FB2.2@5815.53,4451 C28.1@5815.53,4510
XTALIN: C18.2 U6.5 Y1.1 | length 563.5
  Top Layer w11.81: U6.5@5627.47,4292.1 5749.9,4292.1 5838.24,4203.76 Y1.1@6003.26,4203.76
  Top Layer w20: Y1.1@6003.26,4203.76 6003.26,4126.74 6027,4103 C18.2@6067.53,4103
XTALOUT: C19.1 U6.6 Y1.3 | length 705
  Top Layer w11.81: U6.6@5627.47,4311.79 5921.79,4311.79 5956,4346 6061,4346 6108.76,4298.24 Y1.3@6160.74,4298.24
  Top Layer w20: C19.1@6118.46,4400 6150,4400 6160.74,4389.26 Y1.3@6160.74,4298.24
pads on no net: J3.1 J3.2 J3.6 JTAG1.6 U6.2 U6.3 U6.4 U6.8 U6.9 U6.10 U6.11 U6.28 U6.50 U6.56 U6.57 U7.2 U7.3 U7.6 U7.8 U7.9 U7.10 U7.12 U7.13 U7.14 U7.22 U7.23 U7.24 U7.27 U7.28 U8.5 U8.8 U8.11 U8.12 U8.14 U8.15 U8.16 U8.17 U8.21 U8.22 U8.23 U8.24 U8.26 U8.27 U8.29 U8.30 U8.32 U8.33 U8.34 U8.35 U8.40 U8.41 U8.43 U8.44 U8.45 U8.46 U8.47 U8.48 U8.50 U8.51 U8.56 U8.57 U8.58 U8.59 U8.61 U8.62 U8.66 U8.67 U8.72 U8.74 U8.78 U8.79 U8.80 U8.81 U8.87 U8.95 U8.97 U8.98 U8.99 U8.100 U8.101 U8.105 U8.117 U8.124 U8.126 U8.127 U8.131 U8.132 U8.133 U8.134 U8.137 U8.138 U8.139 U8.140 U8.141 U8.142 U8.143 U300.3 X_Debug1.2 X_Debug1.4 X_Debug1.6
copper on no net:
  other v10: 5064,6043 5564,6043

## Polygon pours and split planes (outlines as drawn)
GND on Top Layer "Bottom Layer-No Net" (solid, remove dead copper, pour order 4): 20.05,3248.81 1948.05,3248.81 1952.05,3244.81 1952.05,4736.81 3761.05,4736.81 3765.05,4740.81 3757.05,4748.81 3757.05,6303.81 7880.05,6303.81 7884.05,6299.81 7884.05,2.81 4.05,2.81 12.05,10.81 12.05,3244.81
GND on Bottom Layer "Bottom Layer-No Net" (solid, remove dead copper, pour order 6): 5.93,3246.15 8.93,3243.15 1946.93,3243.15 1946.93,4724.15 1939.93,4731.15 1940.93,4730.15 3749.93,4730.15 3749.93,6293.15 3745.93,6297.15 3749.93,6293.15 7872.93,6293.15 7872.93,13.15 7849.93,-9.85 7844.93,-4.85 1.93,-4.85 1.93,3228.15 -3.07,3233.15

## Keep-outs
Keep-Out Layer:
  lines w10: 0,3152.56 0,152.5 ccw(c152.5,152.5) 152.5,-0.02 ; 0.09,3154.67 cw(c152.61,3154.67) 152.61,3307.19 ; 152.5,0 7721,0 ccw(c7721,152.52) 7873.52,152.52 ; 152.61,3307.09 1102.36,3307.09 1102.36,6146.69 ; 1102.48,6146.69 cw(c1255,6146.69) 1255,6299.21 7722.5,6299.21 cw(c7722.5,6146.71) 7875.02,6146.71 ; 7874.02,152.52 7874.02,6146.71

## Other copper
Top Layer:
  rectangle net GND: 2658,4677 2844,4962
  rectangle net GND: 1424,4200 2054,4310
  rectangle net VCC_PER: 4355,5220 4535,5620
  rectangle net GND: 2528,3455 3185,3620
  rectangle net GND: 3795,3270 3995,3555
  rectangle net GND: 3175,2935 3380,3065
  rectangle net GND: 2865,2795 3010,3055
  rectangle net GND: 3812,5180 3965,5450
  rectangle net GND: 3815,5405 4250,5775
  rectangle net GND: 3855,4200 3930,4480
  rectangle net VCC_MCU: 3975,4120 4195,4240
  rectangle net VCC_MCU: 3970,3700 4070,4240
  rectangle net VCC_MCU: 3995,3955 4060,4195
  rectangle net VCC_FPGA: 3785,2760 4005,3040
  rectangle net VCC_FPGA: 3460,2640 3845,2785
  rectangle net VCC_FPGA: 2550,2810 2725,3040
  rectangle net PWR5V: 3060,2790 3135,3195
  rectangle net PWR5V: 3060,2785 3345,2880
  rectangle net PWR5V: 3400,4175 3765,4710
  rectangle net PWR5V: 3220,3270 3485,5695
  rectangle net PWR5V: 2325,3230 3705,3405
  rectangle net PWR5V: 2085,3185 2386,3620
  rectangle net PWR5V: 1630,3130 3340,3245
  rectangle net PWR5V: 955,3130 1765,3245
  rectangle net PWR5V: 3173,3660 3400,4631
  rectangle net VCC_FPGA: 7405,2310 7640,2385
  rectangle net VCC_FPGA: 2130,2255 2377,2445
  rectangle net PWR5V: 3410,4885 3941,5045
  region net PWR5V: 3584.8,4375 3584.8,4190 3749.8,4190 3749.8,4375
  rectangle net PWR5V: 3420,5365 3725,5695
  rectangle net VCC: 1295,2140 1700,2355
  rectangle net PWR5V: 455,2250 705,2560
  region net PE: 1624,5081 1339,5081 1339,4411 1624,4411
  rectangle net GND: 1590,2535 1880,2695
  rectangle net GND: 1215,2600 1880,2960
  rectangle net PWR5V: 955,2620 1105,3200
  rectangle net GND: 3855,4445 4245,4745
  rectangle net GND: 2245,2590 2376,2855
  rectangle net GND: 375,2730 630,3015
  rectangle net GND: 5900,5345 6245,5515
  rectangle net GND: 6085,2260 6475,2435
  rectangle net GND: 3330,2135 3580,2320
  region net GND: 2159.83,4466 2159.83,4379 2628,4379 2628,4466
  rectangle net GND: 2562,4375 2942,4467
  rectangle net GND: 2790,4380 3098,5235
  rectangle net GND: 1915,4380 2240,4475
  rectangle net GND: 1830,4380 2065,5042
  rectangle net GND: 1965,4420 2220,4790
  rectangle net NetC304_1: 2370,4620 2485,5220
  rectangle net NetC304_1: 2245,4985 2649,5314
  rectangle net GND: 2410,4340 2430,4405
  rectangle net GND: 2395,3805 2445,4270
  rectangle net NetC300_1: 2670,3735 2945,4245
Bottom Layer:
  rectangle net VCC_MCU: 3587,3689 4038,4102
  rectangle net VCC_FPGA: 3420,2598 4113,3254
  rectangle net GND: 2110,4250 2599,4630
  rectangle net GND: 3095,4702 3099,4720
  rectangle net GND: 2795,4681 3277,5234

## Silkscreen, mask and mechanical layers (free items; w line width, h text height)
Top Overlay:
  circle w20: c4788,118 r7.07
  circle w20: c5592,122 r7.07
  circle w20: c6710,283 r7.07
  circle w20: c7482,277 r7.07
  circle w20: c7505,2270 r7.07
  circle w20: c7495,4555 r7.07
  text "ARM PROG" at 7730,4390 h80 r90
  text "DataSampleHub" at 7090,3905 h50
  text "DH070001-0" at 7090,3815 h40
  text "Rev.160926" at 7090,3740 h40
  text "FPGA PROG" at 7710,2170 h80 r90

## Text inside footprints (layer, text, board x,y; h text height)
FL_Sensor: Top Overlay "2" at 1605,97 h50 r90; Top Overlay "1" at 2046,104 h50 r90; Top Overlay "10" at 1611,479 h50 r90; Top Overlay "9" at 2051,511 h50 r90
FL_Sensor1: Top Overlay "10" at 1088,287 h49.6 r270; Top Overlay "9" at 1152.36,434.51 h49.6 r270; Top Overlay "8" at 1130,540 h49.6 r270; Top Overlay "7" at 1206,386 h49.6 r270; Top Overlay "6" at 1251,337 h49.6 r270; Top Overlay "5" at 1145,226 h49.6 r270; Top Overlay "4" at 1037,226 h49.6 r270; Top Overlay "3" at 923,337 h49.6 r270; Top Overlay "2" at 987,419 h49.6 r270; Top Overlay "1" at 1028,540 h49.6 r270
FR_Sensor: Top Overlay "2" at 3124,95 h50 r90; Top Overlay "1" at 3541,111 h50 r90; Top Overlay "10" at 3116,445 h50 r90; Top Overlay "9" at 3551,499 h50 r90
FR_Sensor1: Top Overlay "10" at 2544,280 h49.6 r270; Top Overlay "9" at 2609.06,434.51 h49.6 r270; Top Overlay "8" at 2589,542 h49.6 r270; Top Overlay "7" at 2655,381 h49.6 r270; Top Overlay "6" at 2704,332 h49.6 r270; Top Overlay "5" at 2606,238 h49.6 r270; Top Overlay "4" at 2494,233 h49.6 r270; Top Overlay "3" at 2375,341 h49.6 r270; Top Overlay "2" at 2442.14,401.14 h49.6 r270; Top Overlay "1" at 2495,539 h49.6 r270
GripL_Sensor1: Top Overlay "1" at 4497.24,274.41 h49.6 r270; Top Overlay "2" at 4497.24,174.09 h49.6 r270; Top Overlay "3" at 4597.56,174.09 h49.6 r270; Top Overlay "4" at 4597.56,274.41 h49.6 r270
GripR_Sensor1: Top Overlay "1" at 5284.65,274.41 h49.6 r270; Top Overlay "2" at 5284.65,174.09 h49.6 r270; Top Overlay "3" at 5384.96,174.09 h49.6 r270; Top Overlay "4" at 5384.96,274.41 h49.6 r270
NipL_Sensor1: Top Overlay "1" at 6268.9,274.41 h49.6 r270; Top Overlay "2" at 6369.21,274.41 h49.6 r270
NipR_Sensor1: Top Overlay "1" at 7056.3,274.41 h49.6 r270; Top Overlay "2" at 7156.61,274.41 h49.6 r270